# Allegro board LAYOUT.brd
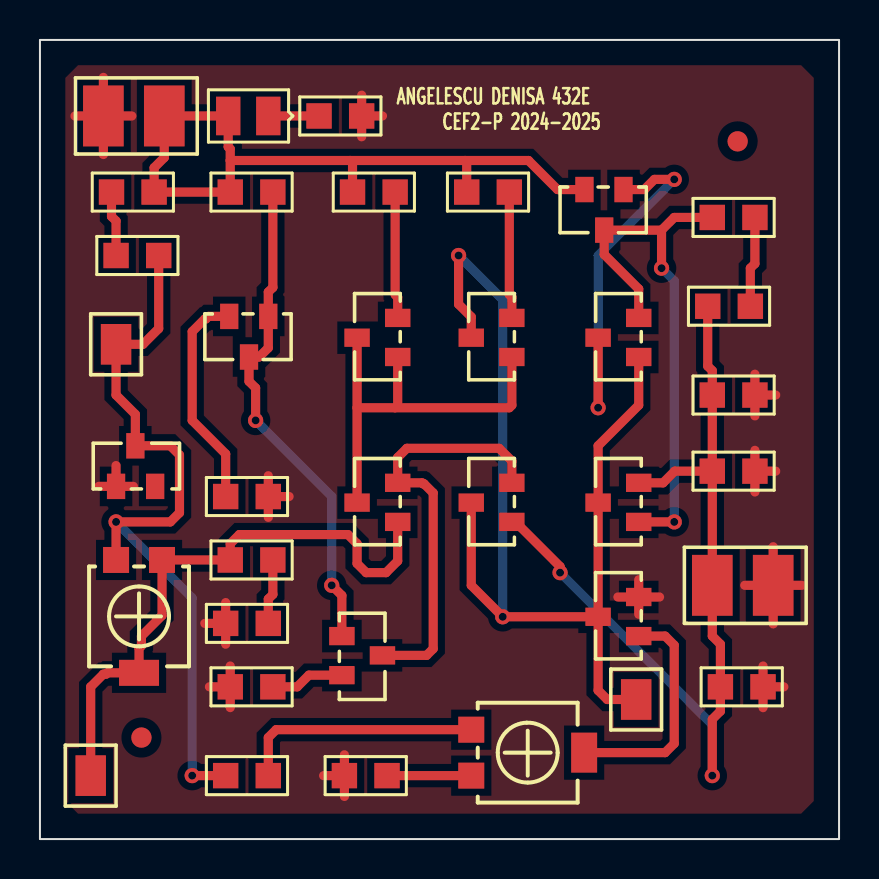
[diagram p0: board, top side]
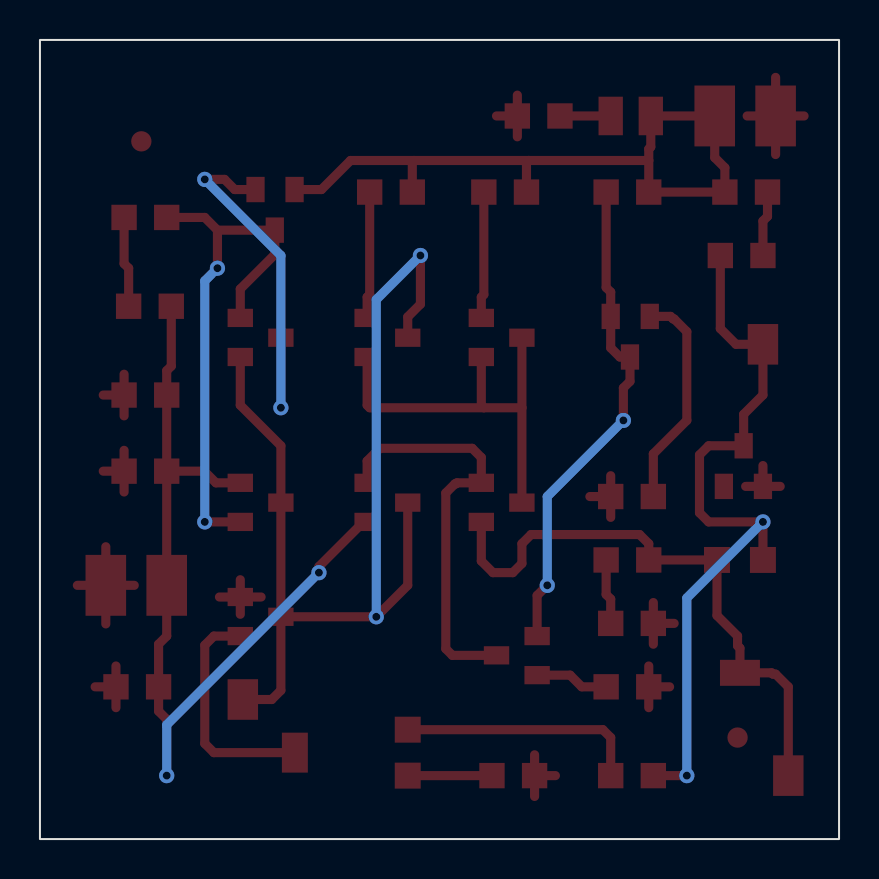
[diagram p1: board, bottom side, seen from below]

Outline 40 x 40 mm; copper layers: TOP, BOTTOM. Coordinates in mm from the lower left corner of the outline.
Outline path: rectangle 0,0 40,40

## Placement (name value [footprint] x y rotation side)
C1  100n  [SMC0805]  36.2 7.62 180 top
D2  BZX84-C2V7  [TO236]  3.81 17.78 270 top
D3  3  [SMD0805]  11.43 36.2 180 top
J1  CON1  [JUMPER1]  3.81 24.77 0 top
J2  CON1  [JUMPER1]  2.54 3.17 0 top
J3  CON1  [JUMPER1]  29.84 6.99 0 top
NOREF  -  []  0 0 90 top
NOREF#2  -  []  0 40 0 top
NOREF#3  -  [unnamed#2]  5.08 5.08 0 top
NOREF#4  -  []  40 0 90 top
NOREF#5  -  [unnamed#2]  34.92 34.92 0 top
NOREF#6  -  []  0 0 0 top
P1  10k  [TS53YL]  3.81 13.97 90 top
P2  5k  [TS53YL]  21.59 3.17 180 top
Q1  QBC846B  [TO236]  23.5 15.88 0 top
Q2  QBC846B  [TO236]  17.78 15.88 0 top
Q3  QBC846B  [TO236]  15.24 10.16 180 top
Q4  QBC846B  [TO236]  11.43 26.04 90 top
Q5  QBC807-25  [TO236]  23.5 24.13 0 top
Q6  QBC807-25  [TO236]  17.78 24.13 0 top
Q7  QBC846B  [TO236]  29.84 15.88 0 top
Q8  QBC846B  [TO236]  29.84 24.13 0 top
Q9  QBC807-25  [TO236]  29.21 32.38 90 top
Q10  QBC846B  [TO236]  29.84 10.16 0 top
R1  22k  [SMR0805]  9.53 13.97 0 top
R5  1k  [SMR0805]  9.53 32.38 0 top
R8  100  [SMR0805]  11.43 17.14 180 top
R10  33  [SMR0805]  17.78 32.38 180 top
R11  33  [SMR0805]  23.5 32.38 180 top
R16  1  [SMR0805]  33.66 31.11 0 top
R17  1k  [SMR0805]  11.43 3.17 180 top
R18  510  [SMR0805]  15.24 3.17 0 top
R20  22  [SMR0805]  9.53 7.62 0 top
R26  100  [SMR0805]  33.66 22.23 0 top
R27  100  [SMR0805]  33.66 18.41 0 top
R28  2k7  [SMR0805]  11.43 10.79 180 top
R29  100  [SMR0805]  5.71 32.38 180 top
R32  68  [SMR0805]  13.97 36.2 0 top
R33  1  [SMR0805]  35.56 26.67 180 top
R34  100  [SMR0805]  3.81 29.21 0 top
VCC  CON2  [JUMPER2]  3.17 36.2 0 top
VO  CON2  [JUMPER2]  33.66 12.7 0 top

## Library data of the parts
C1 = C
D2 = BZX84-C2V7_0
D3 = LED_0
J1-J3 = CON1: User Part Number: ***
P1 P2 = POT
Q1-Q4 Q7 Q8 Q10 = QBC846B_0
Q5 Q6 Q9 = QBC807-25_0
R1 R5 R8 R10 R11 R16-R18 R20 R26-R29 R32-R34 = R
VCC VO = CON2: User Part Number: ***

## Footprints (pads in the part's own frame, mm; a bottom-side part is the same pattern mirrored in y, then rotated)
JUMPER1
  rect 1.524x2.032 smd: 1(0,0)
JUMPER2
  rect 2.032x3.048 smd: 1(0,0) 2(3.048,0)
SMC0805
  rect 1.27x1.27 smd: 1(0,0) 2(2.134,0)
SMD0805
  rect 1.219x1.93 smd: A(2.007,0) C(0,0)
SMR0805
  rect 1.27x1.27 smd: 1(0,0) 2(2.134,0)
TO236
  rect 1.27x0.914 smd: 1(0.127,0) 2(0.127,1.956) 3(-1.905,0.965)
TS53YL
  rect 1.3x1.3 smd: 1(0,0) 3(0,-2.3)
  rect 1.3x2 smd: 2(-5.65,-1.15)
unnamed#2
  round 1.016 smd: (0,0)

## Nets
2V7: D2.3 J1.1 P1.1 R17.2 R34.2
VCC: D3.A(1) Q9.2 R5.1 R10.2 R11.2 R29.1 VCC.2
0: C1.1 D2.1 Q10.2 R8.1 R18.1 R20.1 R26.2 R27.2 R28.2 R32.2 VCC.1 VO.2
INM: C1.2 Q1.1 Q7.2 R26.1 R27.1 R33.2 VO.1
VO1: J3.1 Q1.3 Q5.3 Q7.3 Q8.1 Q10.3
VREF: J2.1 P1.2(T) P1.3(2) Q2.1 R1.1
N72334: Q7.1 Q8.2 Q9.3 R16.1
N72358: R16.2 R33.1
N72432: Q8.3 Q9.1
N72472: Q6.2 R10.1
N72478: Q5.2 R11.1
N72550: R29.2 R34.1
N72608: Q2.3 Q5.1 Q6.1 Q6.3
N72716: Q3.1 Q4.1 Q4.3 R5.2
N72910: Q1.2 Q2.2 Q3.3
N73080: P2.3(2) R17.1
N73144: D3.C(2) R32.1
N73154: R1.2 R28.1
N73170: Q4.2 R8.2
N73176: Q3.2 R20.2
N73260: P2.2(T) Q10.1
N73266: P2.1 R18.2

Pads without a net: D2 2

## Via types
v1: diameter 0.762, hole 0.4, TOP to BOTTOM, 12 vias

## Routing (per net, layer and track width the routed paths; a pad name or vN(x,y) marks a point on that pad's centre or on a via; arc(x,y) is an arc through that point)
2V7: length 38.1
  TOP w0.457: R17.2 v1(7.62,3.17) ; R34.2 5.94,25.55 5.16,24.77 J1.1 3.81,22.23 4.78,21.26 4.78,19.68 6.53,19.68 6.99,19.23 6.99,16.33 6.53,15.88 v1(3.81,15.88) P1.1
  BOTTOM w0.457: v1(3.81,15.88) 7.62,12.06 v1(7.62,3.17)
VCC: length 36.5
  TOP w0.457: 15.53,33.97 15.65,33.85 R10.2 ; 15.53,33.97 9.53,33.97 ; 15.53,33.97 21.28,33.97 ; 9.53,33.97 9.53,34.54 9.42,34.65 D3.A VCC.2 6.22,34.11 5.71,33.6 R29.1 R5.1 9.53,33.97 ; Q9.2 25.91,32.51 24.45,33.97 21.28,33.97 ; 21.28,33.97 21.36,33.88 R11.2
0: length 45
  TOP w0.457: VCC.1 3.17,38.13 ; VCC.1 4.6,36.2 ; VCC.1 3.17,34.26 ; VCC.1 1.75,36.2 ; 2.95,17.65 3.81,17.65 ; 3.81,17.65 4.67,17.65 ; 3.81,17.65 3.81,18.69 ; 36.2,6.58 C1.1 ; C1.1 36.2,8.66 ; C1.1 37.24,7.62 ; 35.79,21.18 R26.2 ; R26.2 35.79,23.27 ; R26.2 36.83,22.23 ; R8.1 12.47,17.14 ; R8.1 11.43,16.1 ; R8.1 11.43,18.19 ; R32.2 16.1,37.24 ; R32.2 17.15,36.2 ; R32.2 16.1,35.15 ; R27.2 36.83,18.41 ; R27.2 35.79,19.46 ; R27.2 35.79,17.37 ; 8.48,7.62 R20.1 ; R20.1 9.53,8.66 ; R20.1 9.53,6.58 ; R28.2 9.3,11.84 ; R28.2 8.25,10.79 ; R28.2 9.3,9.75 ; 28.93,12.12 Q10.2 ; Q10.2 31.01,12.12 ; Q10.2 29.97,11.25 ; Q10.2 29.97,12.98 ; R18.1 15.24,4.22 ; R18.1 15.24,2.13 ; R18.1 14.2,3.17 ; VO.2 36.7,14.63 ; VO.2 38.13,12.7 ; VO.2 35.28,12.7 ; VO.2 36.7,10.77
INM: length 44.8
  TOP w0.457: v1(33.66,3.17) 33.66,5.99 34.06,6.4 C1.2 34.06,9.75 33.66,10.16 VO.1 R27.1 ; R33.2 33.43,23.67 33.66,23.44 R26.1 R27.1 ; R27.1 31.78,18.41 31.19,17.83 Q7.2 ; Q1.1 23.8,15.88 26.04,13.64 v1(26.04,13.34)
  BOTTOM w0.457: v1(26.04,13.34) 33.66,5.71 v1(33.66,3.17)
VO1: length 54.1
  TOP w0.457: Q10.3 Q7.3 27.94,19.68 29.97,21.72 Q8.1 ; Q10.3 27.94,7.44 28.4,6.99 J3.1 ; Q10.3 v1(23.16,11.13) 21.59,12.7 Q1.3 ; v1(20.95,29.21) 20.95,26.77 21.59,26.14 Q5.3
  BOTTOM w0.457: v1(23.16,11.13) 23.16,27 v1(20.95,29.21)
VREF: length 29.6
  TOP w0.457: Q2.1 17.91,13.92 17.32,13.34 16.33,13.34 15.88,13.79 15.88,14.78 15.42,15.24 9.98,15.24 9.53,14.78 R1.1 P1.3 6.11,11.19 5.08,10.16 5.08,9.67 4.96,9.55 P1.2 3.38,8.32 3.31,8.26 3.17,8.26 2.54,7.62 J2.1
N72334: length 27.4
  TOP w0.457: v1(31.11,28.57) 31.11,30.48 ; 31.11,30.48 31.75,31.11 R16.1 ; 31.11,30.48 Q9.3 28.24,29.26 29.97,27.53 Q8.2 ; Q7.1 v1(31.75,15.88)
  BOTTOM w0.457: v1(31.75,15.88) 31.75,27.94 v1(31.11,28.57)
N72358: length 4.5
  TOP w0.457: R16.2 35.79,28.8 35.56,28.57 R33.1
N72432: length 19.3
  TOP w0.457: Q8.3 v1(27.94,21.59) ; Q9.1 30.25,32.51 30.76,33.02 v1(31.75,33.02)
  BOTTOM w0.457: v1(27.94,21.59) 27.94,29.21 v1(31.75,33.02)
N72472: length 6.4
  TOP w0.457: R10.1 17.78,27.25 17.91,27.13 Q6.2
N72478: length 6.4
  TOP w0.457: R11.1 23.5,27.25 23.62,27.13 Q5.2
N72550: length 3.3
  TOP w0.457: R29.2 3.58,31.17 3.81,30.94 R34.1
N72608: length 21.1
  TOP w0.457: 17.78,21.59 23.5,21.59 23.62,21.72 Q5.1 ; 17.78,21.59 15.88,21.59 ; 17.78,21.59 17.91,21.72 Q6.1 ; Q2.3 15.88,21.59 ; 15.88,21.59 Q6.3
N72716: length 24.9
  TOP w0.457: v1(14.61,12.7) 15.11,12.19 Q3.1 ; v1(10.79,20.95) 10.79,22.58 10.46,22.91 Q4.3 10.97,24.13 11.43,24.59 Q4.1 11.43,27.38 11.66,27.61 R5.2
  BOTTOM w0.457: v1(10.79,20.95) 14.61,17.14 v1(14.61,12.7)
N72910: length 21
  TOP w0.457: Q1.2 23.62,18.92 22.99,19.56 18.36,19.56 17.91,19.1 Q2.2 19.13,17.83 19.18,17.78 19.23,17.78 19.68,17.32 19.68,9.53 19.35,9.19 Q3.3
N73080: length 12.2
  TOP w0.457: R17.1 11.43,5.08 11.82,5.47 P2.3
N73144: length 2.5
  TOP w0.457: R32.1 D3.C
N73154: length 3.3
  TOP w0.457: R28.1 11.43,12.01 11.66,12.24 R1.2
N73170: length 11.1
  TOP w0.457: Q4.2 8.43,26.16 8.31,26.04 8.26,26.04 7.62,25.4 7.62,20.95 9.3,19.28 R8.2
N73176: length 3.7
  TOP w0.457: R20.2 12.88,7.62 13.46,8.2 Q3.2
N73260: length 11.6
  TOP w0.457: Q10.1 31.29,10.16 31.75,9.7 31.75,4.78 31.29,4.33 P2.2
N73266: length 4.2
  TOP w0.457: R18.2 P2.1

## Copper pours and planes (outline as drawn; the poured copper is in the pictures)
0 on TOP: 1.27,38.1 1.91,38.73 38.1,38.73 38.73,38.1 38.73,1.91 38.1,1.27 1.91,1.27 1.27,1.91 ; 5 cut-outs

## Text on the board
Ref Des/Silkscreen Top: ANGELESCU DENISA 432E | CEF2-P 2024-2025
XSECTION_CHART: *  SURFACE - AIR 0 MIL | L1: TOP CONDUCTOR - COPPER 0.71 MIL | *  DIELECTRIC - FR-4 61.57 MIL | L2: BOTTOM CONDUCTOR - COPPER 0.71 MIL | DESIGN CROSS SECTION CHART | ___________________________ | TOTAL THICKNESS 62.99 MIL | 1-2 | FIGURE | SIZE | 15.74 | DRILL CHART: TOP to BOTTOM | ALL UNITS ARE IN MILS | PLATED | QTY | 12
